# Altium PCB NAND_08_user.PcbDoc
Units mil, origin at the board's own origin, x right, y up, seen from the top; angles counter-clockwise.
Board outline 6000 x 4000 mil, 2 copper layers (Top Layer, Bottom Layer); 9 components, 33 nets, 214 pads, 28 vias.
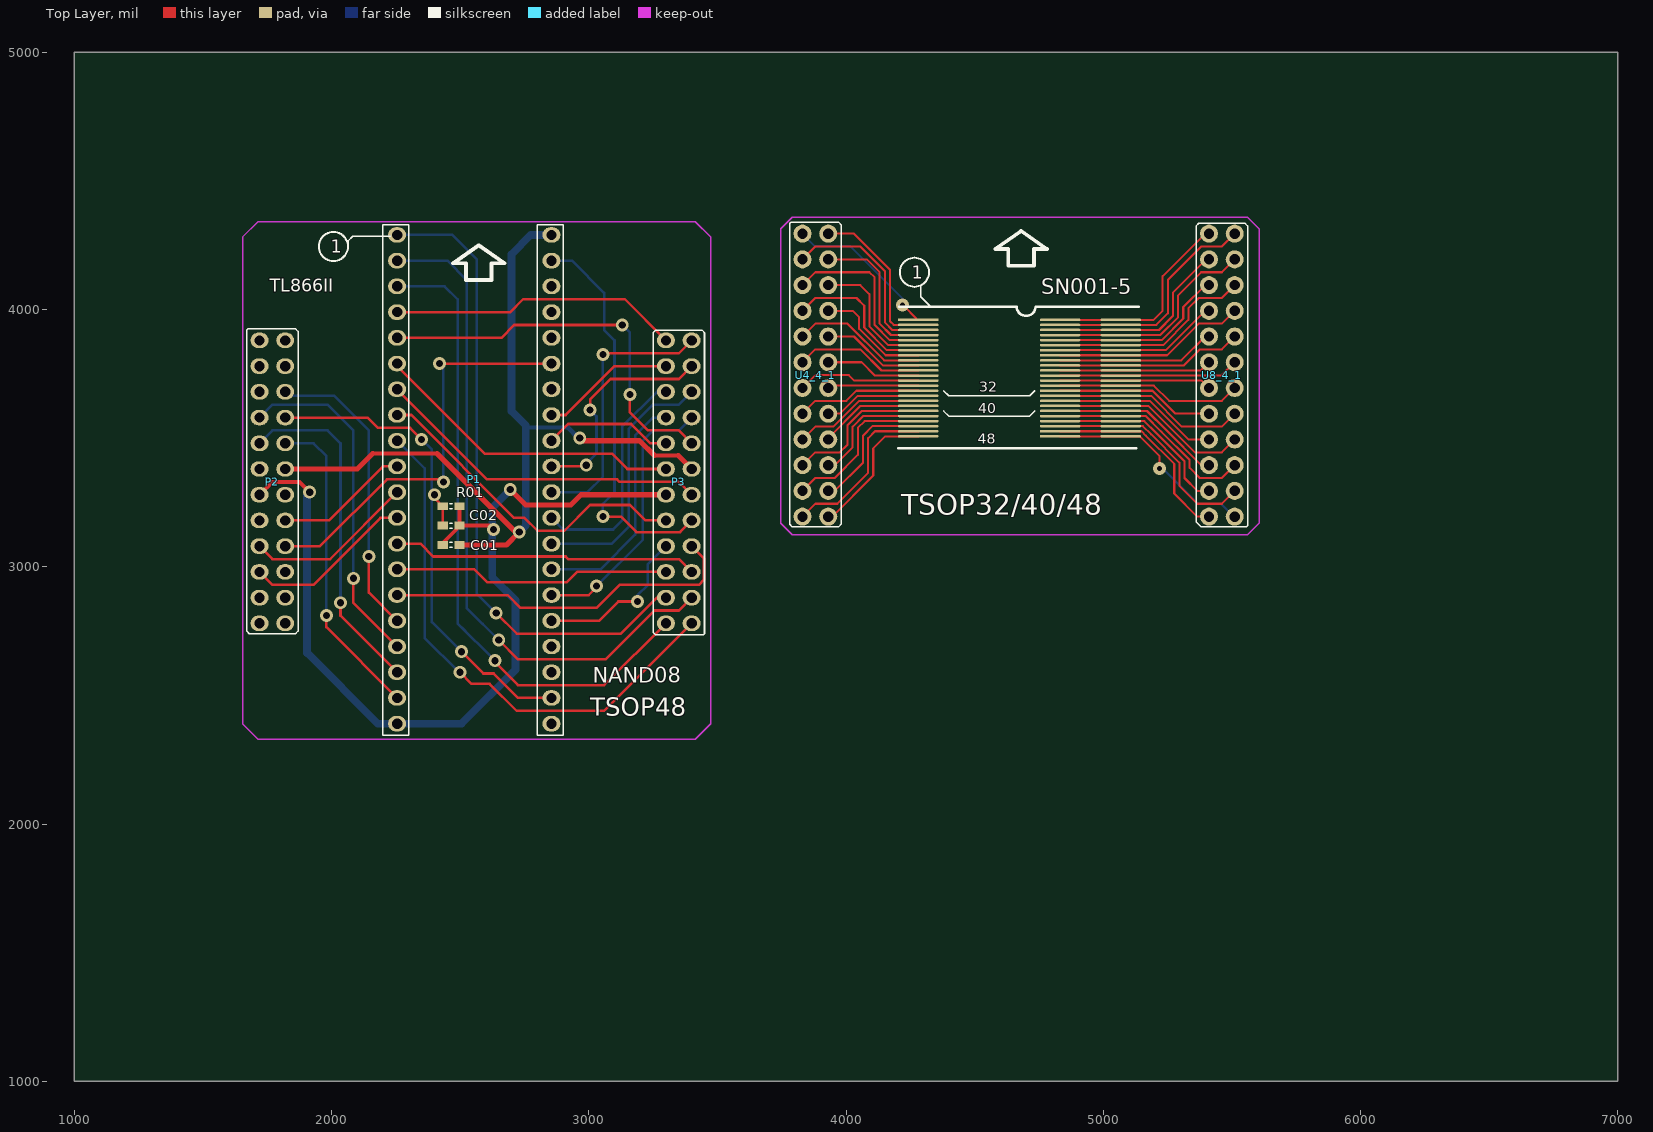
[diagram p0: Top Layer view]
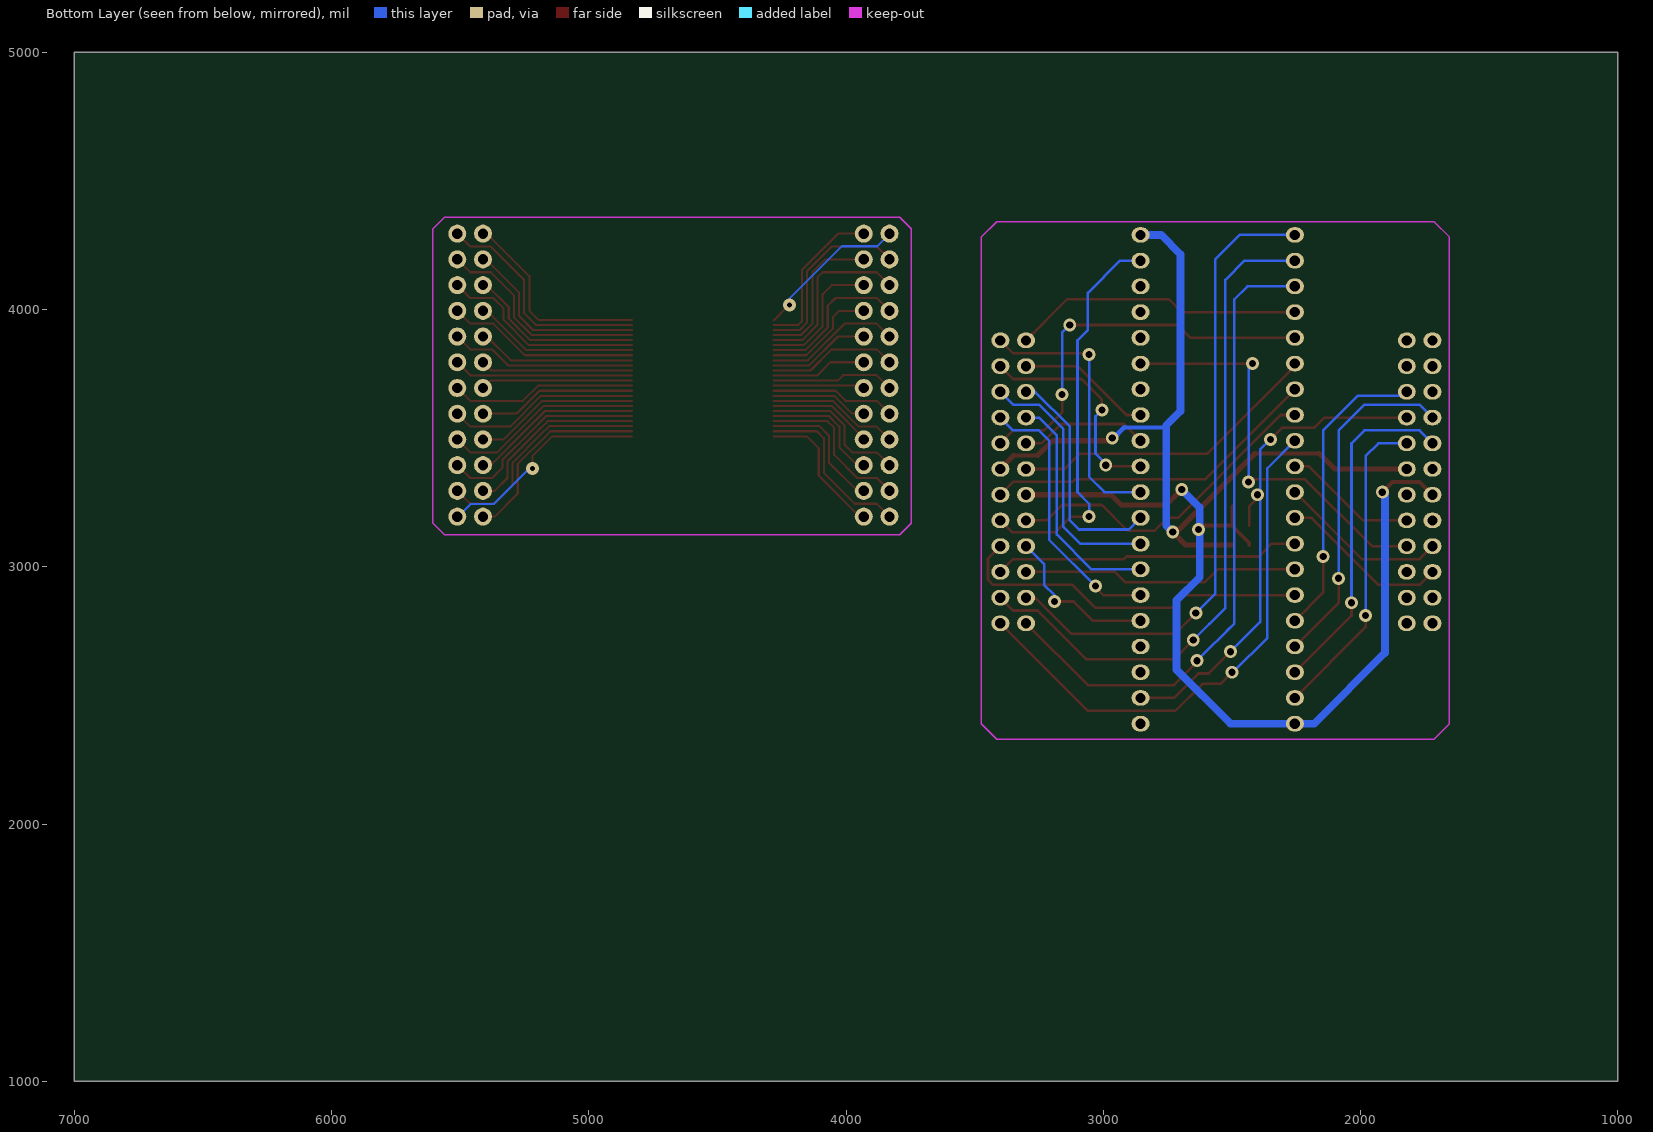
[diagram p1: Bottom Layer view, seen from below]

## Layer stack, top to bottom
Top Layer: signal copper 1.4
Dielectric: dielectric 12.6, FR-4, Dk 4.8
Bottom Layer: signal copper 1.4

## Board outline
1000,1000 7000,1000 7000,5000 1000,5000

## Design rules (kind name [scope] priority, off if disabled: settings)
Clearance [All] p1: gap=8
PolygonConnect [All] p1: connectstyle=Relief reliefconductorwidth=10 reliefentries=4 polygonreliefangle="90 Angle" airgapwidth=10
RoutingVias [All] p1: holewidth=28 width=50 viastyle="Through Hole" minholewidth=28 minwidth=50 maxholewidth=28 maxwidth=50
SilkscreenOverComponentPads [All] p1: minsilkscreentomaskgap=6
SolderMaskExpansion [All] p1: expansion=4
Width [All] p1: maxlimit=30 minlimit=6 preferedwidth=8
27 further rules are at their usual default settings.

## Classes and differential pairs
component class NAND_X8S34: "C01  0.1u" "C02 30P" P1 P2 P3 "R01 3K9"

## Components (designator, comment, footprint, x,y, rotation, side; value= is the part's Value field where it differs from the comment)
C01 "0.1" 0603_2 2465,3085 r0 top
C02 "0.1" 0603_2 2465,3160 r180 top
P1 "ZIF40" SEAT40 3255,4490 r0 top locked
P2 "Header 12X2" DIS44#1 1820,3680 r0 top
P3 "Header 12X2" DIS44#1 3300,2980 r180 top
R01 "3K9" 0603_2 2465,3235 r180 top
TSOP32/40/48 "Comment" TSOP48_14_20MM 4281,3959.96 r0 top locked
U4_4_1 "Comment" DIS44#2 3931,4094.96 r0 top locked
U8_4_1 "Comment" DIS44_2 5411,3594.96 r180 top locked

## Footprints (in the part's own frame and the unit in brackets; to place one, negate y for a bottom-side part, rotate by r counter-clockwise, add the part's x,y. Pads: shape width x height; smd on the part's side, far side on the other; paste and mask are expansions set on the pad)
0603_2 [mil]
  rect 40x30 smd: 1(-32.5,0) 2(32.5,0)
  silkscreen extent -5,-10 5,10
DIS44#1 [mil]
  oval 70x60 hole 40: 1(-100,200) 2(0,200) 3(-100,100) 4(0,100) 5(-100,0) 6(0,0) 7(-100,-100) 8(0,-100) 9(-100,-200) 10(0,-200) 11(-100,-300) 12(0,-300) 13(-100,-400) 14(0,-400) 15(-100,-500) 16(0,-500) 17(-100,-600) 18(0,-600) 19(-100,-700) 20(0,-700) 21(-100,-800) 22(0,-800) 23(-100,-900) 24(0,-900)
  silkscreen extent -150,-940 50,245
DIS44#2 [mil]
  round 70 hole 40: 1(-100,200) 2(-100,100) 3(-100,0) 4(-100,-100) 5(-100,-200) 6(-100,-300) 7(-100,-400) 8(-100,-500) 9(-100,-600) 10(-100,-700) 11(-100,-800) 12(-100,-900) 13(0,-900) 14(0,-800) 15(0,-700) 16(0,-600) 17(0,-500) 18(0,-400) 19(0,-300) 20(0,-200) 21(0,-100) 22(0,0) 23(0,100) 24(0,200)
  silkscreen extent -150,-940 50,245
DIS44_2 [mil]
  round 70 hole 40: 25(-100,400) 26(-100,300) 27(-100,200) 28(-100,100) 29(-100,0) 30(-100,-100) 31(-100,-200) 32(-100,-300) 33(-100,-400) 34(-100,-500) 35(-100,-600) 36(-100,-700) 37(0,-700) 38(0,-600) 39(0,-500) 40(0,-400) 41(0,-300) 42(0,-200) 43(0,-100) 44(0,0) 45(0,100) 46(0,200) 47(0,300) 48(0,400)
  silkscreen extent -150,-740 50,440
SEAT40 [mil]
  oval 70x60 hole 40: 1(-1000,-200) 2(-1000,-300) 3(-1000,-400) 4(-1000,-500) 5(-1000,-600) 6(-1000,-700) 7(-1000,-800) 8(-1000,-900) 9(-1000,-1000) 10(-1000,-1100) 11(-1000,-1200) 12(-1000,-1300) 13(-1000,-1400) 14(-1000,-1500) 15(-1000,-1600) 16(-1000,-1700) 17(-1000,-1800) 18(-1000,-1900) 19(-1000,-2000) 20(-1000,-2100) 21(-400,-2100) 22(-400,-2000) 23(-400,-1900) 24(-400,-1800) 25(-400,-1700) 26(-400,-1600) 27(-400,-1500) 28(-400,-1400) 29(-400,-1300) 30(-400,-1200) 31(-400,-1100) 32(-400,-1000) 33(-400,-900) 34(-400,-800) 35(-400,-700) 36(-400,-600) 37(-400,-500) 38(-400,-400) 39(-400,-300) 40(-400,-200)
  silkscreen extent -1055,-2145 -355,-160
TSOP48_14_20MM [mm]
  rect 4x0.25 smd: 1(0,0)
  oval 4x0.25 smd: 2(0,-0.5) 3(0,-1) 4(0,-1.5) 5(0,-2) 6(0,-2.5) 7(0,-3) 8(0,-3.5) 9(0,-4) 10(0,-4.5) 11(0,-5) 12(0,-5.5) 13(0,-6) 14(0,-6.5) 15(0,-7) 16(0,-7.5) 17(0,-8) 18(0,-8.5) 19(0,-9) 20(0,-9.5) 21(0,-10) 22(0,-10.5) 23(0,-11) 24(0,-11.5) 25(14,-11.5) 25(20,-11.5) 26(14,-11) 26(20,-11) 27(14,-10.5) 27(20,-10.5) 28(14,-10) 28(20,-10) 29(14,-9.5) 29(20,-9.5) 30(14,-9) 30(20,-9) 31(14,-8.5) 31(20,-8.5) 32(14,-8) 32(20,-8) 33(14,-7.5) 33(20,-7.5) 34(14,-7) 34(20,-7) 35(14,-6.5) 35(20,-6.5) 36(14,-6) 36(20,-6) 37(14,-5.5) 37(20,-5.5) 38(14,-5) 38(20,-5) 39(14,-4.5) 39(20,-4.5) 40(14,-4) 40(20,-4) 41(14,-3.5) 41(20,-3.5) 42(14,-3) 42(20,-3) 43(14,-2.5) 43(20,-2.5) 44(14,-2) 44(20,-2) 45(14,-1.5) 45(20,-1.5) 46(14,-1) 46(20,-1) 47(14,-0.5) 47(20,-0.5) 48(14,0) 48(20,0)
  silkscreen extent -1.96,-12.67 21.77,1.28

## Part data
C01 C02: library part CAP, "Capacitor"
P2 P3: "Header, 12-Pin, Dual row"
R01: library part R

## Via types
v1: diameter 50, hole 28, Top Layer to Bottom Layer, 26 vias
v2: diameter 50, hole 20, Top Layer to Bottom Layer, 2 vias

## Nets (pads, with @x,y where several pads share a name; then routed paths per layer and width w, separated by ;. In a path a pad name is that pad's centre, name@x,y a point inside that pad or via, vN(x,y) a via of type N, cw(c..) or ccw(c..) an arc to the next point about the centre after c; other vN are vias at no path point)
ALE: P1.11 P2.17 | length 663.4
  Top Layer w10: P2.17 1770,3030 1995,3030 P1.11
CE1#: P1.18 P2.9 | length 1348.2
  Top Layer w10: v1(2035,2860) 2035,2810 P1.18
  Bottom Layer w10: P2.9 1770,3530 1985,3530 2035,3480 v1(2035,2860) ; P2.9@1735,3465 P2.9@1742.5,3472.5
CE2#: P1.19 P2.10 | length 1234.6
  Top Layer w10: v1(1980,2810) 1980,2765 P1.19
  Bottom Layer w10: P2.10 1930,3480 1980,3430 v1(1980,2810)
CLE: P1.10 P2.16 | length 522
  Top Layer w10: P2.16 1990,3180 2200,3390 P1.10
D8: P1.3 P3.2 | length 2569.9
  Top Layer w10: v1(2635,2635) 2635,2630 2725,2540 3060,2540 P3.2
  Bottom Layer w10: P1.3 2415,4090 2440,4090 2490,4040 2490,2780 ; 2520,2750 2490,2780 ; v1(2635,2635) 2490,2780
D9: P1.2 P3.3 | length 2721.7
  Top Layer w10: v1(2650,2715) 2725,2640 3065,2640 3255,2830 3350,2830 P3.3
  Bottom Layer w10: P1.2 2440,4190 2450,4190 2525,4115 2525,2840 ; 2587.5,2777.5 2525,2840 ; v1(2650,2715) 2525,2840
D10: P1.1 P3.4 | length 2506.5
  Top Layer w10: v1(2640,2820) 2720,2740 3125,2740 3265,2880 P3.4
  Bottom Layer w10: P1.1 2405,4290 2470,4290 2565,4195 2565,2895 v1(2640,2820)
D11: P1.39 P3.9 | length 1550.5
  Top Layer w10: v1(3055,3195) 3125,3195 3185,3135 3355,3135 P3.9
  Bottom Layer w10: P1.39 2935,4190 3060,4065 3060,3920 3100,3880 3100,3290 3055,3245 v1(3055,3195)
E0: P1.13 P3.5 | length 1190.6
  Top Layer w10: P1.13 2345,3090 2395,3040 2910,3040 2920,3030 3350,3030 P3.5
E1: P1.14 P3.6 | length 1082.3
  Top Layer w10: P1.14 2555,2990 2605,2940 2915,2940 2955,2980 P3.6
E2: P1.15 P3.7 | length 1409.2
  Top Layer w10: P1.15 2685,2890 2735,2840 3030,2840 3120,2930 3428,2930 3448,2950 3448,3032 P3.7
E3: P1.25 P3.8 | length 626.6
  Top Layer w10: P1.25 3040,2790 3115,2865 v1(3190,2865)
  Bottom Layer w10: v1(3190,2865) 3190,2890 3230,2930 3230,3010 P3.8
E4: P1.26 P3.17 | length 1059.3
  Top Layer w10: P1.26 3000,2890 3030,2920 v1(3030,2925)
  Bottom Layer w10: v1(3030,2925) 3210,3105 3210,3490 3250,3530 3350,3530 P3.17
E5: P1.27 P3.18 | length 914.9
  Bottom Layer w10: P1.27 3045,2990 3180,3125 3180,3510 3250,3580 P3.18
E6: P1.28 P3.19 | length 1012
  Bottom Layer w10: P1.28 3090,3090 3155,3155 3155,3535 3250,3630 3350,3630 P3.19
E7: P1.29 P3.20 | length 899.1
  Bottom Layer w10: P1.29 2900,3145 3095,3145 3130,3180 3130,3255 3130,3545 3265,3680 P3.20
G12: P1.32 P3.16 | length 517.1
  Top Layer w10: P1.32@2865,3480 P1.32 2920,3555 3165,3555 3240,3480 P3.16
G13: P1.31 P3.21 | length 877.8
  Top Layer w10: P1.31 2995,3390 v1(2990,3395) ; v1(3005,3610) 3005,3650 3085,3730 3350,3730 P3.21
  Bottom Layer w10: v1(2990,3395) 2990,3400 3030,3440 3030,3585 v1(3005,3610)
G14: P1.33 P3.22 | length 523.7
  Top Layer w10: P1.33 2910,3590 3100,3780 P3.22
G15: P1.30 P3.23 | length 1067.6
  Top Layer w10: v1(3055,3825) 3060,3830 3115,3830 3350,3830 P3.23
  Bottom Layer w10: P1.30 2995,3290 3055,3350 v1(3055,3825)
PIN25: P1.9 P3.1 | length 2107.4
  Top Layer w10: v1(2500,2590) 2545,2545 2615,2545 2720,2440 3060,2440 P3.1
  Bottom Layer w10: P1.9 2362,3383 2362,2723 2495,2590 v1(2500,2590)
PIN34: P1.8 P3.10 | length 1297.7
  Top Layer w10: P1.8 2310,3590 2710,3190 2750,3190 2800,3140 2905,3140 3005,3240 3160,3240 3220,3180 P3.10
PIN35: P1.7 P3.11 | length 1314.8
  Top Layer w10: P1.7 2605,3340 3110,3340 3120,3330 3350,3330 P3.11
PIN38: P1.6 P3.14 | length 1220.7
  Top Layer w10: P1.6 2255,3780 2595,3440 3090,3440 3150,3380 P3.14
PIN39: P1.5 P3.15 | length 1537.8
  Top Layer w10: P1.5 2660,3890 2710,3940 v1(3130,3940) ; v1(3160,3670) 3160,3600 3230,3530 3350,3530 P3.15
  Bottom Layer w10: v1(3130,3940) 3160,3910 v1(3160,3670)
PIN48: P1.4 P3.24 | length 1132
  Top Layer w10: P1.4 2695,3990 2745,4040 3140,4040 P3.24
RB1#: P1.17 P2.7 | length 1337.5
  Top Layer w10: v1(2085,2955) 2085,2860 P1.17
  Bottom Layer w10: P2.7 1770,3630 1985,3630 2085,3530 v1(2085,2955)
RB2#: P1.16 P2.6 | length 1172.7
  Top Layer w10: v1(2145,3040) 2145,2900 P1.16
  Bottom Layer w10: P2.6 1835,3665 2010,3665 2145,3530 v1(2145,3040)
RD#: C02.2 P1.22 P2.8 R01.2 | length 2020.7
  Top Layer w10: P2.8 2140,3580 2180,3540 2305,3540 v1(2350,3495) ; v1(2400,3280) 2395,3275 2395,3272.5 R01.2 C02.2 ; v1(2505,2670) 2590,2585 2630,2585 2725,2490 P1.22
  Bottom Layer w10: v1(2350,3495) 2390,3455 v1@2390,3280 ; v1(2400,3280) 2390,3270 2390,2785 v1(2505,2670)
VCC: C01.2 P1.40 P2.12 P3.13 | length 3332.6
  Top Layer w15: 2052.5,3377.5 2055,3380 ; 2160,3440 2410,3440 ; 3255.47,3432 3348,3432
  Top Layer w20: P2.12 2055,3380 2100,3380 2160,3440 ; 2410,3440 2715,3135 v1(2730,3135) 2680,3085 C01.2 ; v1(2965,3500) 2975,3490 3197.47,3490 3255.47,3432 ; 3348,3432 P3.13
  Bottom Layer w15: 2763,3542 2918,3542
  Bottom Layer w20: 2755,3550 2763,3542 ; 2918,3542 2960,3500 v1(2965,3500)
  Bottom Layer w30: v1(2730,3135) 2755,3160 2755,3550 2700,3605 2700,4215 2775,4290 P1.40
VSS: C01.1 C02.1 P1.20 P2.13 P3.12 R01.1 | length 3602.7
  Top Layer w15: P2.13 1770,3330 1875,3330 v1(1915,3290) ; C01.1 2432.5,3092.5 2497.5,3157.5 C02.1 ; R01.1 C02.1 ; v1(2630,3145) 2615,3160 C02.1
  Top Layer w20: v1(2695,3300) 2755,3240 2930,3240 2970,3280 P3.12
  Bottom Layer w30: v1(1915,3290) 1905,3280 1905,2665 2180,2390 P1.20 2505,2390 2715,2600 2715,2870 2625,2960 2625,3140 v1(2630,3145) ; v1@2625,3145 2625,3230 v1(2695,3300)
WP#: P1.12 P2.19 | length 663.4
  Top Layer w10: P2.19 1770,2930 1930,2930 2190,3190 P1.12
WR#: P1.35 P2.18 | length 1628.1
  Top Layer w10: P2.18 1955,3080 2215,3340 2425,3340 v1(2435,3330) ; v1(2420,3790) P1.35
  Bottom Layer w10: v1(2420,3790) 2435,3775 v1(2435,3330)
pads on no net: P1.21 P1.23 P1.24 P1.34 P1.36 P1.37 P1.38 P2.1 P2.2 P2.3 P2.4 P2.5 P2.11 P2.14 P2.15 P2.20 P2.21 P2.22 P2.23 P2.24 TSOP32/40/48.1 TSOP32/40/48.2 TSOP32/40/48.3 TSOP32/40/48.4 TSOP32/40/48.5 TSOP32/40/48.6 TSOP32/40/48.7 TSOP32/40/48.8 TSOP32/40/48.9 TSOP32/40/48.10 TSOP32/40/48.11 TSOP32/40/48.12 TSOP32/40/48.13 TSOP32/40/48.14 TSOP32/40/48.15 TSOP32/40/48.16 TSOP32/40/48.17 TSOP32/40/48.18 TSOP32/40/48.19 TSOP32/40/48.20 TSOP32/40/48.21 TSOP32/40/48.22 TSOP32/40/48.23 TSOP32/40/48.24 TSOP32/40/48.25 TSOP32/40/48.26 TSOP32/40/48.27 TSOP32/40/48.28 TSOP32/40/48.29 TSOP32/40/48.30 TSOP32/40/48.31 TSOP32/40/48.32 TSOP32/40/48.33 TSOP32/40/48.34 TSOP32/40/48.35 TSOP32/40/48.36 TSOP32/40/48.37 TSOP32/40/48.38 TSOP32/40/48.39 TSOP32/40/48.40 TSOP32/40/48.41 TSOP32/40/48.42 TSOP32/40/48.43 TSOP32/40/48.44 TSOP32/40/48.45 TSOP32/40/48.46 TSOP32/40/48.47 TSOP32/40/48.48 U4_4_1.1 U4_4_1.2 U4_4_1.3 U4_4_1.4 U4_4_1.5 U4_4_1.6 U4_4_1.7 U4_4_1.8 U4_4_1.9 U4_4_1.10 U4_4_1.11 U4_4_1.12 U4_4_1.13 U4_4_1.14 U4_4_1.15 U4_4_1.16 U4_4_1.17 U4_4_1.18 U4_4_1.19 U4_4_1.20 U4_4_1.21 U4_4_1.22 U4_4_1.23 U4_4_1.24 U8_4_1.25 U8_4_1.26 U8_4_1.27 U8_4_1.28 U8_4_1.29 U8_4_1.30 U8_4_1.31 U8_4_1.32 U8_4_1.33 U8_4_1.34 U8_4_1.35 U8_4_1.36 U8_4_1.37 U8_4_1.38 U8_4_1.39 U8_4_1.40 U8_4_1.41 U8_4_1.42 U8_4_1.43 U8_4_1.44 U8_4_1.45 U8_4_1.46 U8_4_1.47 U8_4_1.48
copper on no net: | length 30303.2
  Top Layer w8: 3831,3194.96 3881,3244.96 3966,3244.96 4086,3364.96 4086,3499.96 4112.93,3526.89 4281,3526.89 ; 3831,3294.96 3881,3344.96 3956,3344.96 4046,3434.96 4046,3539.96 4072.3,3566.26 4281,3566.26 ; 3831,3394.96 3881,3444.96 3976,3444.96 4006,3474.96 4006,3549.96 4061.67,3605.63 4281,3605.63 ; 3831,3494.96 3881,3544.96 3951,3544.96 4051.04,3645 4281,3645 ; 3831,3594.96 3881,3644.96 4001,3644.96 4040.41,3684.37 4281,3684.37 ; 3831,3694.96 3881,3744.96 4011,3744.96 4032.22,3723.74 4281,3723.74 ; 3831,3794.96 3881,3844.96 4056,3844.96 4137.85,3763.11 4281,3763.11 ; 3831,3894.96 3881,3944.96 4006,3944.96 4148.48,3802.48 4281,3802.48 ; 3831,3994.96 3881,4044.96 4041,4044.96 4071,4014.96 4071,3929.96 4159.11,3841.85 4281,3841.85 ; 3831,4094.96 3881,4144.96 3911,4144.96 ; 3831,4194.96 3881,4244.96 4056,4244.96 4151,4149.96 4151,3949.96 4180.37,3920.59 4281,3920.59 ; 3831,4294.96 3841,4294.96 ; 3886,4144.96 4091,4144.96 ; 3931,3194.96 3946,3194.96 4106,3354.96 4106,3459.96 4153.25,3507.21 4281,3507.21 ; 3931,3294.96 3956,3294.96 4066,3404.96 4066,3509.96 4102.62,3546.58 4281,3546.58 ; 3931,3394.96 3956,3394.96 4026,3464.96 4026,3544.96 4066.99,3585.95 4281,3585.95 ; 3931,3494.96 3931,3499.96 4056.36,3625.32 4281,3625.32 ; 3931,3594.96 3976,3594.96 4045.73,3664.69 4281,3664.69 ; 3931,3694.96 3940.1,3704.06 4281,3704.06 ; 3931,3794.96 4061,3794.96 4112.54,3743.43 4281,3743.43 ; 3931,3894.96 4031,3894.96 4143.17,3782.8 4281,3782.8 ; 3931,3994.96 4026,3994.96 4051,3969.96 4051,3924.96 4153.8,3822.17 4281,3822.17 ; 3931,4094.96 4056,4094.96 4091,4059.96 4091,3934.96 4164.43,3861.54 4281,3861.54 ; 3931,4194.96 4081,4194.96 4131,4144.96 4131,3944.96 4175.06,3900.91 4281,3900.91 ; 3931,4294.96 4031,4294.96 4171,4154.96 4171,3954.96 4185.69,3940.28 4281,3940.28 ; 4061,4144.96 4091,4144.96 ; v2(4220,4018) 4278.04,3959.96 4281,3959.96 ; 4281,3881.22 4169.74,3881.22 4111,3939.96 4111,4124.96 4091,4144.96 ; 4832.18,3507.21 5068.4,3507.21 5141.79,3507.21 5219,3430 v2(5219,3382) ; 4832.18,3526.89 5068.4,3526.89 5149.07,3526.89 5166,3509.96 5276,3399.96 5276,3284.96 5366,3194.96 5411,3194.96 ; 4832.18,3546.58 5068.4,3546.58 5154.39,3546.58 5186,3514.96 5296,3404.96 5296,3314.96 5366,3244.96 5461,3244.96 5511,3294.96 ; 4832.18,3566.26 5068.4,3566.26 5159.7,3566.26 5206,3519.96 5316,3409.96 5316,3344.96 5366,3294.96 5411,3294.96 ; 4832.18,3585.95 5068.4,3585.95 5165.02,3585.95 5226,3524.96 5336,3414.96 5336,3384.96 5375.96,3345 5461.04,3345 5511,3394.96 ; 4832.18,3605.63 5068.4,3605.63 5170.33,3605.63 5246,3529.96 5381,3394.96 5411,3394.96 ; 4832.18,3625.32 5068.4,3625.32 5175.65,3625.32 5266,3534.96 5356,3444.96 5461,3444.96 5511,3494.96 ; 4832.18,3645 5068.4,3645 5180.96,3645 5331,3494.96 5411,3494.96 ; 4832.18,3664.69 5068.4,3664.69 5186.28,3664.69 5306,3544.96 5461,3544.96 5511,3594.96 ; 4832.18,3684.37 5068.4,3684.37 5191.59,3684.37 5281,3594.96 5411,3594.96 ; 4832.18,3704.06 5068.4,3704.06 5196.91,3704.06 5256,3644.96 5461,3644.96 5511,3694.96 ; 4832.18,3723.74 5068.4,3723.74 5382.22,3723.74 5411,3694.96 ; 4832.18,3743.43 5068.4,3743.43 5459.47,3743.43 5511,3794.96 ; 4832.18,3763.11 5068.4,3763.11 5379.15,3763.11 5411,3794.96 ; 4832.18,3782.8 5068.4,3782.8 5313.84,3782.8 5376,3844.96 5461,3844.96 5511,3894.96 ; 4832.18,3802.48 5068.4,3802.48 5303.52,3802.48 5396,3894.96 5411,3894.96 ; 4832.18,3822.17 5068.4,3822.17 5248.21,3822.17 5371,3944.96 5461,3944.96 5511,3994.96 ; 4832.18,3841.85 5068.4,3841.85 ; 4832.18,3861.54 5068.4,3861.54 5232.58,3861.54 5331,3959.96 5331,4004.96 5371,4044.96 5461,4044.96 5511,4094.96 ; 4832.18,3881.22 5068.4,3881.22 5227.26,3881.22 5311,3964.96 5311,4009.96 5396,4094.96 5411,4094.96 ; 4832.18,3900.91 5068.4,3900.91 5221.95,3900.91 5291,3969.96 5291,4054.96 5381,4144.96 5461,4144.96 5511,4194.96 ; 4832.18,3920.59 5068.4,3920.59 5216.63,3920.59 5271,3974.96 5271,4064.96 5401,4194.96 5411,4194.96 ; 4832.18,3940.28 5068.4,3940.28 5206.32,3940.28 5251,3984.96 5251,4114.96 5381,4244.96 5461,4244.96 5511,4294.96 ; 4832.18,3959.96 5068.4,3959.96 5196,3959.96 5231,3994.96 5231,4129.96 5396,4294.96 5411,4294.96 ; 5066,3841.85 5242.89,3841.85 5396,3994.96 5411,3994.96
  Bottom Layer w8: 3831,4294.96 3831,4293 3878,4246 4016,4246 4220,4042 v2(4220,4018) ; v2(5219,3382) 5231,3382 5369,3244 5459,3244 5508.04,3194.96 5511,3194.96

## Keep-outs
Keep-Out Layer:
  lines w6: 3746,3190 3746,3169 ; 3746,4300 3746,4314 ; 5606,3202 5606,3169 ; 5606,4303 5606,4314 ; 3746,3169 3791,3124 5561,3124 5606,3169 ; 3746,3169 3746,4314 ; 3746,4314 3791,4359 5561,4359 5606,4314 ; 5606,3169 5606,4314 ; 1654,2389.6 1654,4281.6 1714,4341.6 3414,4341.6 3474,4281.6 3474,2389.6 3414,2329.6 1714,2329.6 1654,2389.6

## Silkscreen, mask and mechanical layers (free items; w line width, h text height)
Top Overlay:
  circle w8: c4266,4144.96 r56.57
  circle w8: c2007.4,4245 r56.57
  lines w6: 2063.97,4245 2063.97,4266.57 2082.4,4285 2117.4,4285 2227.4,4285 ; 4291,4094.96 4291,4049.96 4326,4014.96 ; 2472.4,4180 2572.4,4250 2672.4,4180 2622.4,4180 2622.4,4115 2617.4,4115 2522.4,4115 2522.4,4180 2472.4,4180 ; 4581,4234.96 4631,4234.96 4631,4169.96 4726,4169.96 4731,4169.96 4731,4234.96 4781,4234.96 4681,4304.96 4581,4234.96
  lines w15: 2472.4,4180 2522.4,4180 2522.4,4115 2622.4,4115 2622.4,4180 2672.4,4180 2572.4,4250 2472.4,4180 ; 4581,4234.96 4681,4304.96 4781,4234.96 4731,4234.96 4731,4169.96 4631,4169.96 4631,4234.96 4581,4234.96
  text "1" at 1997.4,4220 h50
  text "1" at 4256,4119.96 h50
  text "TL866II" at 1760,4070 h50
  text "SN001-5" at 4760,4060 h60
  text "NAND08" at 3015,2550 h60
  text "TSOP48" at 3005,2420 h70

## Text inside footprints (layer, text, board x,y; h text height)
TSOP32/40/48: Top Overlay "48" at 4512.89,3477.68 h39.37; Top Overlay "40" at 4513.28,3597.76 h39.37; Top Overlay "32" at 4517.22,3680.43 h39.37